# EAGLE board logic_translator (EAGLE 6.2)
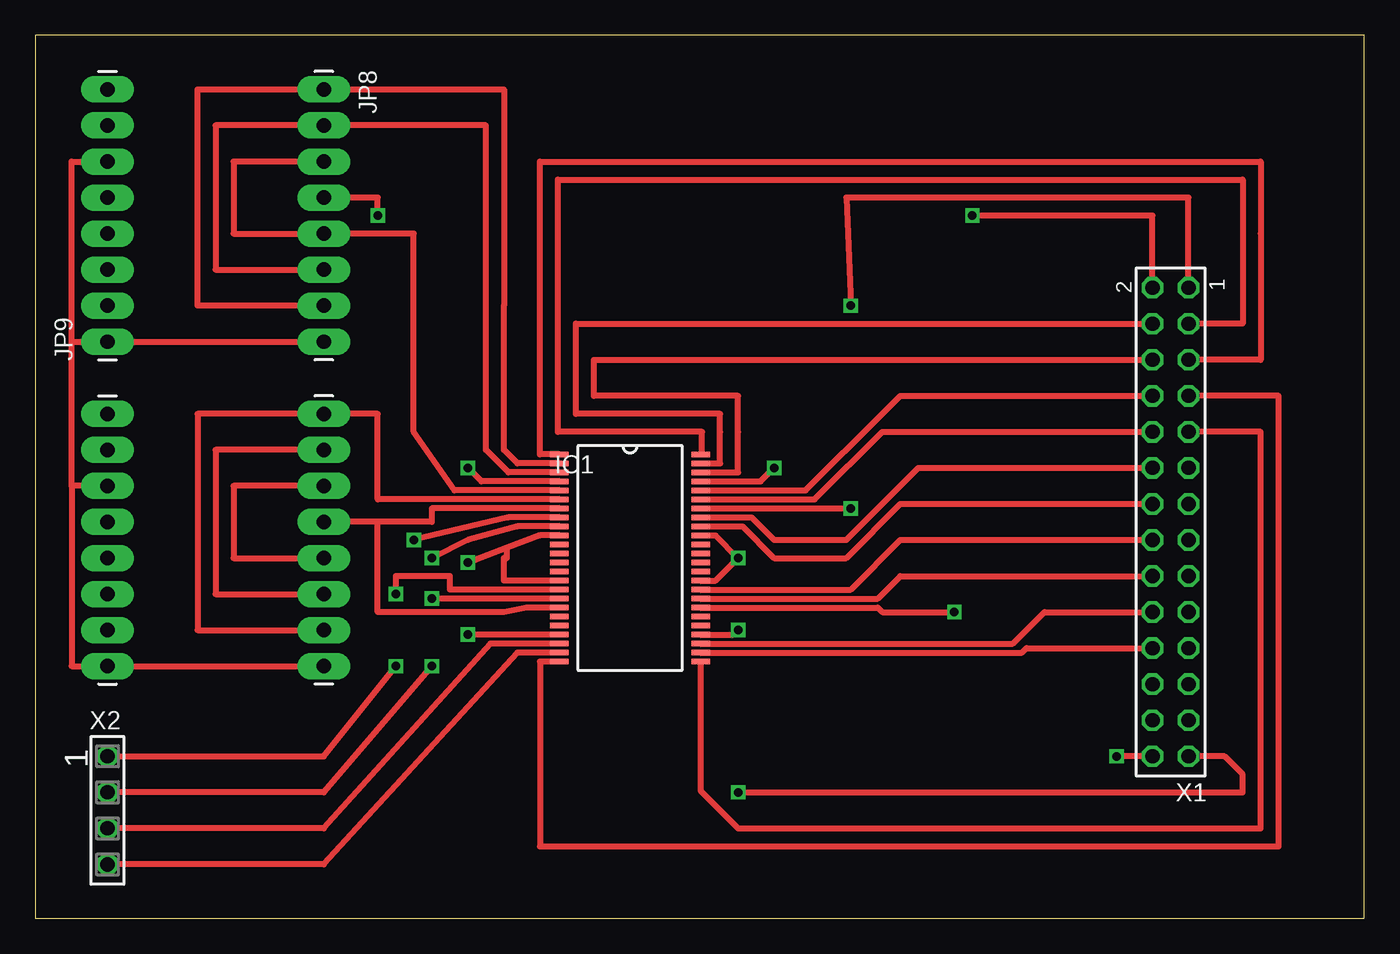
[diagram p0: board, top side]
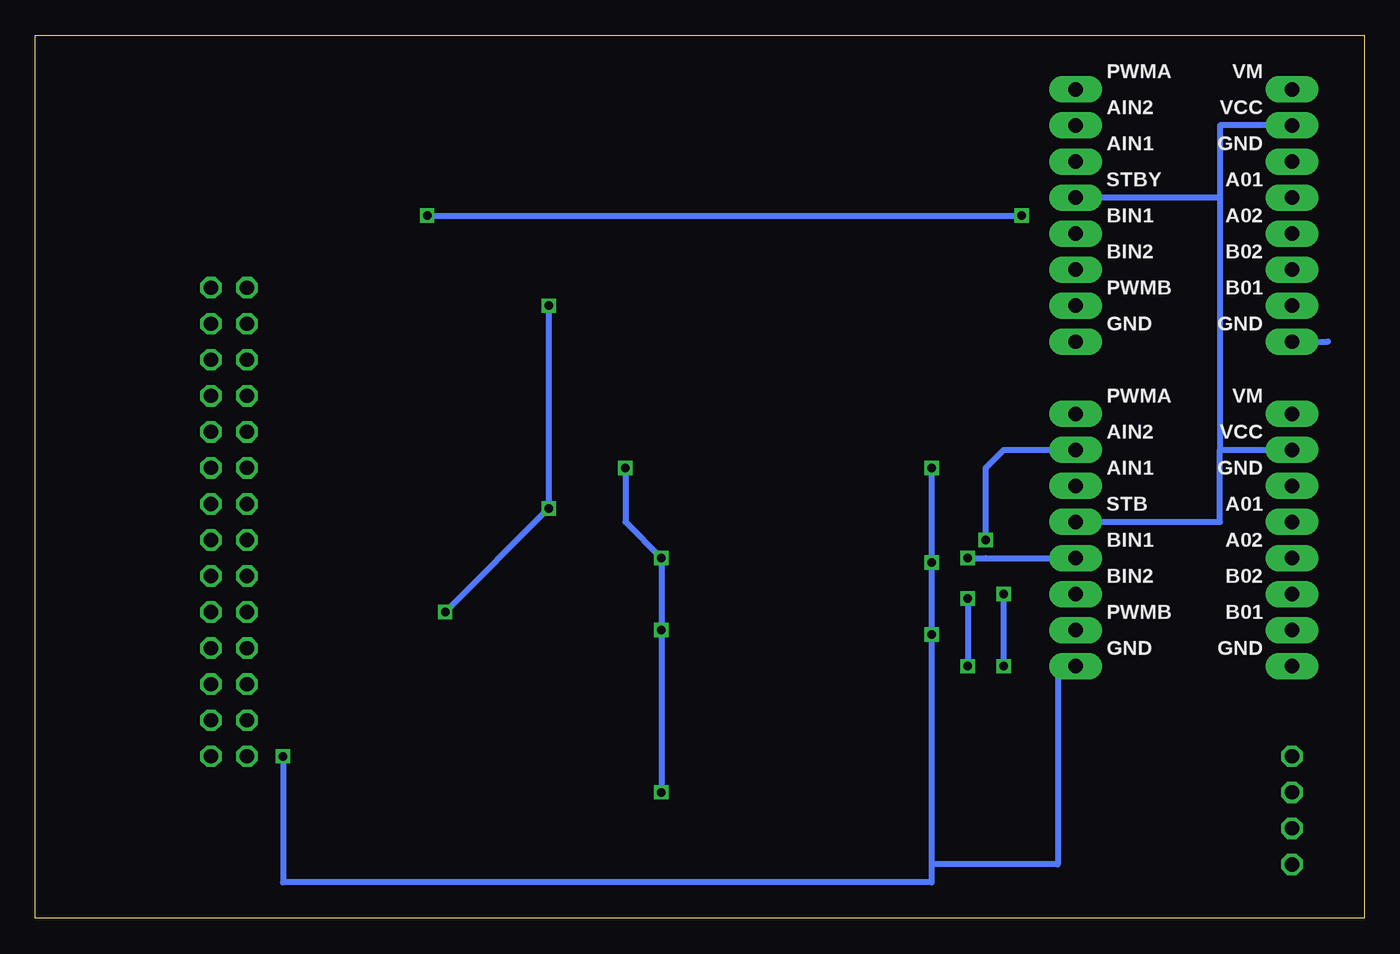
[diagram p1: board, bottom side, seen from below]

Size 93.65 x 62.22 mm. Coordinates in mm from the lower left corner, seen from the top.
Outline: 0,0 93.65,0 93.65,62.22 0,62.22 0,0
Copper layers (1*16): Top 0.035mm / dielectric 1.5mm / Bottom 0.035mm
Design rules: minimum track width 10mil, minimum drill 24mil, track to track 8mil, track to pad 8mil, pad to pad 8mil, via to via 8mil, smd to smd 8mil, copper to edge 40mil, drill to drill 8mil, minimum pad ring 10mil, minimum via ring 8mil, stop-mask expansion 4mil, vias tented up to drill 0mil, thermal gap 10mil

## Footprints (pad centres in the part's own frame; a part is rotated, then mirrored left to right if it is on the bottom)
DL_R-PDSO-G48 = smd 1.3 x 0.4: 1 -4.98,7.303; 2 -4.98,6.668; 3 -4.98,6.032; 4 -4.98,5.397; 5 -4.98,4.763; 6 -4.98,4.128; 7 -4.98,3.493; 8 -4.98,2.857; 9 -4.98,2.223; 10 -4.98,1.587; 11 -4.98,0.953; 12 -4.98,0.318; 13 -4.98,-0.318; 14 -4.98,-0.953; 15 -4.98,-1.587; 16 -4.98,-2.223; 17 -4.98,-2.857; 18 -4.98,-3.493; 19 -4.98,-4.128; 20 -4.98,-4.763; 21 -4.98,-5.397; 22 -4.98,-6.032; 23 -4.98,-6.668; 24 -4.98,-7.303; 25 4.98,-7.303; 26 4.98,-6.668; 27 4.98,-6.032; 28 4.98,-5.397; 29 4.98,-4.763; 30 4.98,-4.128; 31 4.98,-3.493; 32 4.98,-2.857; 33 4.98,-2.223; 34 4.98,-1.587; 35 4.98,-0.953; 36 4.98,-0.318; 37 4.98,0.318; 38 4.98,0.953; 39 4.98,1.587; 40 4.98,2.223; 41 4.98,2.857; 42 4.98,3.493; 43 4.98,4.128; 44 4.98,4.763; 45 4.98,5.397; 46 4.98,6.032; 47 4.98,6.668; 48 4.98,7.303
1X08_LONGPADS = drill 1.016 pad 1.88 long: 1 0,0; 2 2.54,0; 3 5.08,0; 4 7.62,0; 5 10.16,0; 6 12.7,0; 7 15.24,0; 8 17.78,0
TSW-114-02-S-D = drill 1 pad 1.5 octagon: 1 16.51,-1.27; 2 16.51,1.27; 3 13.97,-1.27; 4 13.97,1.27; 5 11.43,-1.27; 6 11.43,1.27; 7 8.89,-1.27; 8 8.89,1.27; 9 6.35,-1.27; 10 6.35,1.27; 11 3.81,-1.27; 12 3.81,1.27; 13 1.27,-1.27; 14 1.27,1.27; 15 -1.27,-1.27; 16 -1.27,1.27; 17 -3.81,-1.27; 18 -3.81,1.27; 19 -6.35,-1.27; 20 -6.35,1.27; 21 -8.89,-1.27; 22 -8.89,1.27; 23 -11.43,-1.27; 24 -11.43,1.27; 25 -13.97,-1.27; 26 -13.97,1.27; 27 -16.51,-1.27; 28 -16.51,1.27
SSW-104-02-S-S = drill 1 pad 1.5 octagon: 1 -3.81,0; 2 -1.27,0; 3 1.27,0; 4 3.81,0

## Placement (x,y rotation side)
IC1  SN74LVCR162245A  [DL_R-PDSO-G48]  41.91,25.4 0 top
JP1  [1X08_LONGPADS]  5.08,17.78 90 top
JP2  [1X08_LONGPADS]  20.32,35.56 270 top
JP8  [1X08_LONGPADS]  20.32,58.42 270 top
JP9  [1X08_LONGPADS]  5.08,40.64 90 top
X1  TSW-114-02-S-D  [TSW-114-02-S-D]  80.01,27.94 90 top
X2  SSW-104-02-S-S  [SSW-104-02-S-S]  5.08,7.62 270 top

## Library data of the parts
IC1 = texas; MPN: SN74LVCR162245DL; OC_FARNELL: 1739707; OC_NEWARK: 50R6613
JP1 JP2 JP8 JP9 = SparkFun
X1 = con-samtec; OC_FARNELL: unknown; OC_NEWARK: unknown
X2 = con-samtec; MPN: SSW-104-02-S-S; OC_FARNELL: unknown; OC_NEWARK: 11P9384

## Nets
AIN1: IC1.5 JP8.3 JP8.5
AIN2: IC1.3 JP8.2 JP8.6
GND: IC1.4 IC1.10 IC1.15 IC1.21 JP1.1 JP1.6 JP2.8 JP8.8 JP9.1 JP9.6 X1.28
N$1: IC1.1 X1.5
N$2: IC1.16 X2.1
N$3: IC1.28 IC1.34 IC1.39 IC1.45 X1.27
N$5: IC1.25 X1.9
N$6: IC1.24 X1.7
N$7: IC1.6 JP2.1 JP2.7
N$8: IC1.48 X1.3
N$9: IC1.47 X1.4
N$10: IC1.46 X1.6
N$11: IC1.44 X1.8
N$12: IC1.43 X1.10
N$13: IC1.41 X1.12
N$14: IC1.40 X1.14
N$15: IC1.33 X1.16
N$16: IC1.32 X1.18
N$17: IC1.27 X1.20
N$18: IC1.26 X1.22
N$19: IC1.8 JP2.2 JP2.6
N$20: IC1.9 JP2.3 JP2.5
N$21: IC1.17 X2.2
N$22: IC1.22 X2.3
N$28: IC1.23 X2.4
PWMA: IC1.2 JP8.1 JP8.7
VCC1.8V: IC1.31 IC1.42 X1.1
VCC5V: IC1.7 IC1.18 JP1.7 JP2.4 JP8.4 JP9.7 X1.2

## Tracks (layer width: path | path; a pad name or v marks a point on that pad's centre or on a via)
AIN1
  Top 0.406: JP8.3 13.97,53.34 13.97,48.26 JP8.5 26.67,48.26 26.67,34.29 29.53,30.16 IC1.5
AIN2
  Top 0.406: JP8.6 12.7,45.72 12.7,55.88 JP8.2 31.75,55.88 31.75,33.02 33.34,31.43 IC1.3
GND  (via drill 0.6)
  Top 0.406: JP8.8 JP9.1 2.54,40.64 | IC1.21 v30.48,20 | IC1.10 35.56,26.99 33.23,26.11 | 33.23,26.11 v30.48,25.08 | IC1.4 31.43,30.8 v30.48,31.75 | X1.28 v76.2,11.43 | IC1.15 33.02,23.81 33.02,24.13 33.02,25.4 33.23,25.4 33.23,26.11 | 2.54,30.48 JP1.6 2.54,30.48 | 2.54,30.48 2.54,17.78 JP1.1 JP2.8 | 2.54,30.48 2.54,40.64 | 2.54,40.64 2.54,53.34 JP9.6
  Bottom 0.406: JP1.6 3.81,30.48 | 30.48,3.81 v30.48,20 v30.48,25.08 v30.48,31.75 | 30.48,3.81 30.48,2.54 76.2,2.54 v76.2,11.43 | JP2.8 21.59,17.78 21.59,3.81 30.48,3.81 | JP9.1 2.54,40.64
N$1
  Top 0.406: IC1.1 35.56,32.7 35.56,53.34 86.36,53.34 86.36,48.26 86.36,39.37 X1.5
N$2  (via drill 0.6)
  Top 0.406: X2.1 19.05,11.43 20.32,11.43 v25.4,17.78 | IC1.16 29.21,23.18 29.21,24.13 25.4,24.13 v25.4,22.86
  Bottom 0.406: v25.4,17.78 v25.4,22.86
N$3  (via drill 0.6)
  Top 0.406: IC1.45 51.12,30.8 v52.07,31.75 | IC1.28 49.21,20 v49.53,20.32 | IC1.34 47.94,23.81 v49.53,25.4 47.94,26.99 IC1.39 | v49.53,8.89 85.09,8.89 85.09,10.16 83.82,11.43 X1.27
  Bottom 0.406: v52.07,31.75 52.07,27.94 v49.53,25.4 v49.53,20.32 v49.53,8.89
N$5
  Top 0.406: IC1.25 46.89,8.99 49.53,6.35 86.36,6.35 86.36,8.89 86.36,34.29 X1.9
N$6
  Top 0.406: IC1.24 35.56,18.1 35.56,5.08 87.63,5.08 87.63,6.35 87.63,36.83 X1.7
N$7
  Top 0.406: IC1.6 24.13,29.53 24.13,35.56 JP2.1 11.43,35.56 11.43,20.32 JP2.7
N$8
  Top 0.406: IC1.48 46.99,32.7 46.99,34.29 36.83,34.29 36.83,52.07 85.09,52.07 85.09,41.91 X1.3
N$9
  Top 0.406: IC1.47 48.26,32.07 48.26,34.29 48.26,35.56 38.1,35.56 38.1,36.83 38.1,41.91 X1.4
N$10
  Top 0.406: IC1.46 49.53,31.43 49.53,34.29 49.53,36.83 39.37,36.83 39.37,39.37 76.2,39.37 X1.6
N$11
  Top 0.406: IC1.44 54.29,30.16 59.69,35.56 60.96,36.83 X1.8
N$12
  Top 0.406: IC1.43 54.93,29.53 59.69,34.29 X1.10
N$13
  Top 0.406: IC1.41 50.48,28.26 52.07,26.67 57.15,26.67 62.23,31.75 X1.12
N$14
  Top 0.406: IC1.40 49.85,27.62 52.07,25.4 57.15,25.4 60.96,29.21 X1.14
N$15
  Top 0.406: IC1.33 57.47,23.18 60.96,26.67 X1.16
N$16
  Top 0.406: IC1.32 59.37,22.54 60.96,24.13 X1.18
N$17
  Top 0.406: IC1.27 68.9,19.37 69.85,20.32 71.12,21.59 X1.20
N$18
  Top 0.406: IC1.26 69.53,18.73 69.85,19.05 X1.22
N$19  (via drill 0.6)
  Top 0.406: JP2.2 12.7,33.02 12.7,22.86 JP2.6 | IC1.8 33.34,28.26 v26.67,26.67
  Bottom 0.406: v26.67,26.67 26.67,31.75 25.4,33.02 JP2.2
N$20  (via drill 0.6)
  Top 0.406: JP2.3 13.97,30.48 13.97,25.4 JP2.5 | IC1.9 33.97,27.62 30.48,26.67 v27.94,25.4
  Bottom 0.406: v27.94,25.4 26.67,25.4 JP2.5
N$21  (via drill 0.6)
  Top 0.406: IC1.17 v27.94,22.54 | v27.94,17.78 20.32,8.89 X2.2
  Bottom 0.406: v27.94,22.54 v27.94,17.78
N$22
  Top 0.406: IC1.22 32.07,19.37 20.32,6.35 X2.3
N$28
  Top 0.406: IC1.23 33.97,18.73 20.32,3.81 X2.4
PWMA
  Top 0.406: IC1.2 33.97,32.07 33.02,33.02 33.02,43.18 33.02,58.42 JP8.1 11.43,58.42 11.43,43.18 JP8.7
VCC1.8V  (via drill 0.6)
  Top 0.406: IC1.42 v57.47,28.89 | IC1.31 59.37,21.91 59.69,21.59 v64.77,21.59 | X1.1 81.28,50.8 57.15,50.8 v57.47,43.18
  Bottom 0.406: v64.77,21.59 v57.47,28.89 v57.47,43.18
VCC5V  (via drill 0.6)
  Top 0.406: X1.2 78.74,49.53 v66.04,49.53 | v24.13,49.53 24.13,50.8 JP8.4 | IC1.7 27.94,28.89 27.94,27.94 24.13,27.94 | 24.13,27.94 JP2.4 | IC1.18 34.61,21.91 33.02,21.59 24.13,21.59 24.13,27.94
  Bottom 0.406: v66.04,49.53 v24.13,49.53 | JP9.7 10.16,55.88 10.16,50.8 | 10.16,50.8 JP8.4 | JP2.4 10.16,27.94 10.16,33.02 | 10.16,33.02 JP1.7 | 10.16,50.8 10.16,33.02

## Text on the board
bPlace: VM | PWMA | VCC | AIN2 | GND | AIN1 | A01 | STBY | A02 | BIN1 | B02 | BIN2 | B01 | PWMB | GND | GND | VM | PWMA | VCC | AIN2 | GND | AIN1 | A01 | STB | A02 | BIN1 | B02 | BIN2 | B01 | PWMB | GND | GND